# Altium PCB FLIR LWIR.PcbDoc (part 4 of 5)
Units mil, origin at the board's own origin, x right, y up, seen from the top; angles counter-clockwise.
Board outline 1511 x 3115 mil, 2 copper layers (Top Layer, Bottom Layer); 105 components, 128 nets, 625 pads, 229 vias.
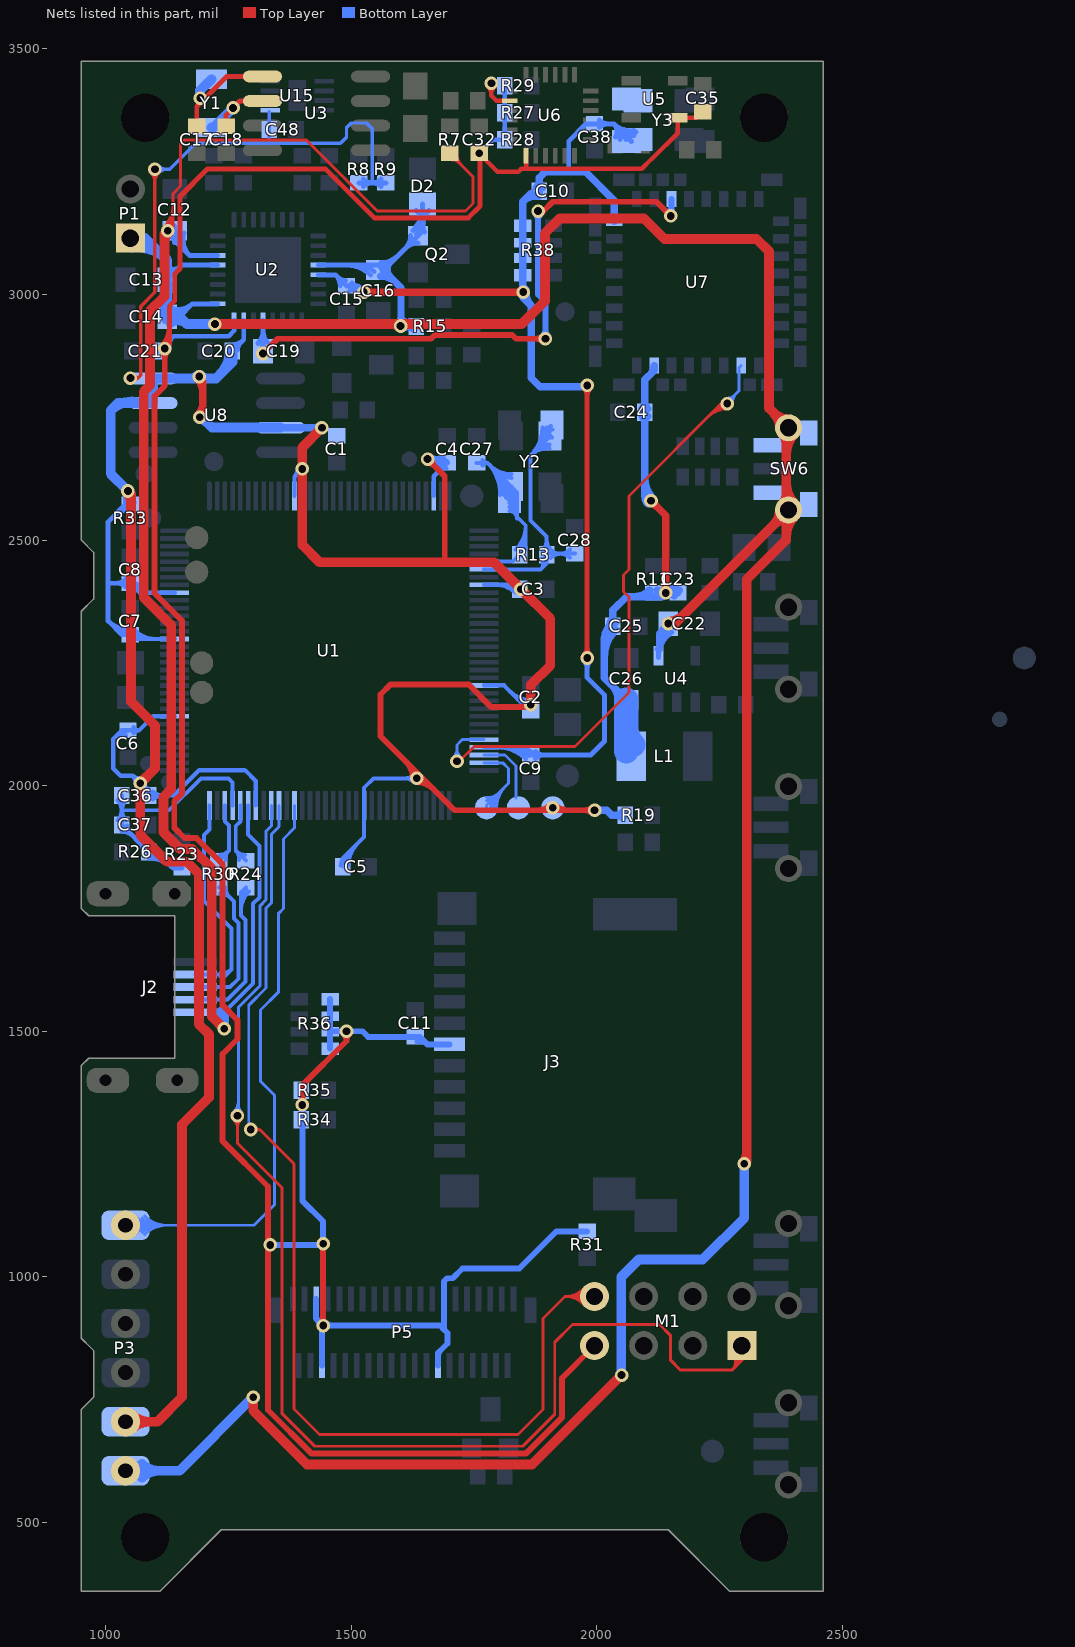
[diagram p4: the nets of this part, all layers, seen from the top]

## Via types
v1: diameter 27.56, hole 15.75, Top Layer to Bottom Layer, tented both sides, 229 vias

## Nets (pads, with @x,y where several pads share a name; then routed paths per layer and width w, separated by ;. In a path a pad name is that pad's centre, name@x,y a point inside that pad or via, vN(x,y) a via of type N, cw(c..) or ccw(c..) an arc to the next point about the centre after c; other vN are vias at no path point) (continued)
UART0_RX: M1.1 U1.88 | length 2840.5
  Top Layer w6: v1@1260.38,1320.38 cw(c1241.98,1301.98) 1268,1301.98 cw(c1294.02,1301.98) v1@1275.62,1320.38 ; v1(1268,1328) 1268,1272 1359,1181 1359,721.15 1425.15,655 1848.94,655 1914,720.06 1914,867.03 1949.97,903 2127,903 2150,880 2150,830 2170,810 2275,810 ; M1.1@2275.58,841.93 cw(c2258.74,826.27) 2275,810 ; 2279.4,814.4 ccw(c2263.29,830.5) M1.1@2279.97,846.02 ; 2283.8,818.8 ccw(c2267.85,834.74) M1.1@2284.36,850.11 ; 2288.2,823.2 ccw(c2272.41,838.98) M1.1@2288.76,854.19 ; M1.1@2291.75,833.67 cw(c2291.3,830) 2295,830 ; 2292.6,827.6 ccw(c2276.97,843.22) M1.1@2293.15,858.28 ; M1.1@2295,860 2295,830 ; M1.1@2298.25,833.67 ccw(c2298.7,830) 2295,830 ; 2275,810 2295,830
  Bottom Layer w6: v1@1260.38,1335.62 ccw(c1237.15,1358.85) 1270,1358.85 ; v1@1264.62,1331.38 ccw(c1251.63,1344.37) 1270,1344.37 ; v1@1270,1330 1270,1548.94 1314.19,1593.13 1314.19,1755.64 1325.72,1767.17 1325.72,1906.63 1336.89,1917.8 U1.88@1336.89,1960.04 ; 1270,1349.2 ccw(c1289.2,1349.2) v1@1275.62,1335.62
UART0_TX: M1.8 U1.87 | length 2392.2
  Top Layer w6: v1(1295,1300) 1313.18,1300 ; v1@1304.46,1294.83 cw(c1313.18,1290.07) 1313.18,1300 ; v1@1304.46,1305.17 ccw(c1313.18,1309.93) 1313.18,1300 ; M1.8@1975.38,942.15 ccw(c1935,905.42) 1935,960 ; M1.8@1975.38,977.85 cw(c1935,1014.58) 1935,960 ; M1.8@1979.82,946.19 ccw(c1948.57,917.76) 1948.57,960 ccw(c1948.57,1002.24) M1.8@1979.82,973.81 ; M1.8@1984.25,950.22 ccw(c1962.14,930.11) 1962.14,960 ccw(c1962.14,989.89) M1.8@1984.25,969.78 ; M1.8@1995,960 1935,960 ; 1313.18,1300 1383,1230.18 1383,731.09 1435.09,679 1839,679 1890,730 1890,915 1935,960
  Bottom Layer w6: v1@1291,1300 1291,1552.97 1326.19,1588.16 1326.19,1750.67 1337.72,1762.2 1337.72,1901.66 1352.64,1916.58 U1.87@1352.64,1960.04
UART2_RX: pad.1@1775,1955 U1.63 | length 313
  Bottom Layer w6: U1.63@1769.96,2046.65 1808.35,2046.65 1820,2035 1820,2005 1775,1960 pad.1@1775,1955 ; pad.1@1775,1969.62 ccw(c1775,1992.85) 1791.43,1976.43 ; pad.1@1775,1975.62 ccw(c1775,2013.34) 1801.67,1986.67 ; pad.1@1783.62,1955 cw(c1816.51,1955) 1793.25,1978.25 ; pad.1@1789.62,1955 cw(c1836.99,1955) 1803.5,1988.5 ; pad.1@1795.62,1955 cw(c1857.48,1955) 1813.74,1998.74
UART2_TX: pad.1@1840,1955 U1.62 | length 139.3
  Bottom Layer w6: U1.62@1769.96,2062.4 1812.6,2062.4 1835,2040 pad.1@1835,1975
UART4_TX: P3.6 pad.3@1040,1105 U1.85 | length 1652
  Bottom Layer w6: pad.3@1040,1105 1301.82,1105 1343,1146.18 1343,1370 1315,1398 1315,1543.03 1351.22,1579.25 1351.22,1739.41 1361.72,1749.9 1361.72,1891.72 1384.13,1914.13 U1.85@1384.13,1960.04 ; pad.3@1050.61,1094.39 cw(c1076.21,1068.79) 1076.21,1105 cw(c1076.21,1141.21) pad.3@1050.61,1115.61 ; pad.3@1054.85,1090.15 cw(c1090.7,1054.3) 1090.7,1105 cw(c1090.7,1155.7) pad.3@1054.85,1119.85 ; pad.3@1059.09,1085.91 cw(c1105.18,1039.82) 1105.18,1105 cw(c1105.18,1170.18) pad.3@1059.09,1124.09 ; P3.6@1069.82,1094.39 cw(c1095.43,1068.79) 1095.43,1105 cw(c1095.43,1141.21) P3.6@1069.82,1115.61 ; P3.6@1074.06,1090.15 cw(c1109.91,1054.3) 1109.91,1105 cw(c1109.91,1155.7) P3.6@1074.06,1119.85 ; P3.6@1078.3,1085.91 cw(c1124.4,1039.82) 1124.4,1105 cw(c1124.4,1170.18) P3.6@1078.3,1124.09
USB5V: C12.2 J2.1 R7.2 U1.91 U2.22 | length 3895.5
  Top Layer w6: v1@1118.38,3137.62 ccw(c1073.42,3182.58) 1137,3182.58 ; v1@1122.62,3133.38 ccw(c1087.9,3168.1) 1137,3168.1 ; v1(1126,3130) 1137,3141 ; v1@1126.86,3129.14 ccw(c1102.39,3153.61) 1137,3153.61 ; v1@1130.46,3139.81 ccw(c1132.87,3145.13) 1137,3141 ; v1@1131.11,3124.89 ccw(c1116.88,3139.12) 1137,3139.12 ; v1@1135.81,3134.46 cw(c1141.13,3136.87) 1137,3141 ; R7.2@1700,3287.44 1747.78,3239.66 1747.78,3185.56 1732.22,3170 1552.57,3170 1407.57,3315 1160,3315 1152.22,3307.22 1152.22,3220.76 1137,3205.54 1137,3141 ; R7.2@1701.97,3274.69 cw(c1701.97,3248.67) 1720.37,3267.07 ; R7.2@1708.72,3287.44 ccw(c1729.76,3287.44) R7.2@1714.88,3272.56 ; R7.2@1714.72,3287.44 ccw(c1750.25,3287.44) 1725.12,3262.32
  Top Layer w20: 1119.22,3104.51 cw(c1151.49,3104.51) v1@1128.67,3127.33 ; v1(1126,3130) 1119.22,3123.22 1119.22,2995.93 1090.22,2966.93 1090.22,2815.22 1077.22,2802.22 1077.22,2382.78 1133,2327 1133,1993 1117.22,1977.22 1117.22,1905.21 1150.89,1871.54 1151.43,1871.54 ; 1151.43,1871 1175.77,1871 1215.78,1830.99 1215.78,1530.22 v1(1241,1505)
  Bottom Layer w8: 1234.17,1542.69 ccw(c1234.17,1569.74) 1253.29,1550.61 ; 1241.49,1538.82 1300,1597.33 1300,1759.83 1312.72,1772.55 1312.72,1877.28 1289.65,1900.35 U1.91@1289.65,1960.04
  Bottom Layer w10: C12.2@1125.39,3121.24 cw(c1124.31,3105.59) 1140,3105.59 ; C12.2@1126.08,3131.22 cw(c1125.05,3116.3) C12.2@1140,3116.3 ; C12.2@1126.45,3131.13 cw(c1116.15,3105.34) C12.2@1141.85,3115.88 ; C12.2@1126.78,3141.19 cw(c1125.79,3127.02) C12.2@1140,3127.02 ; C12.2@1131.42,3120.17 ccw(c1122.75,3135.9) C12.2@1140.48,3133.09 ; C12.2@1140,3140 C12.2@1140,3130 1140,3110 1170.47,3079.53 ; C12.2@1140.24,3131.52 ccw(c1167.35,3122.89) 1147.23,3102.77 ; C12.2@1149.76,3128.48 ccw(c1184.98,3117.28) 1158.85,3091.15 ; C12.2@1159.29,3125.45 ccw(c1202.62,3111.67) 1170.47,3079.53 ; U2.22@1227.59,3079.53 1170.47,3079.53
  Bottom Layer w20: 1232.04,1538.82 ccw(c1246.18,1538.82) 1236.18,1528.82 ; v1@1237.37,1506.07 ccw(c1209.33,1514.32) 1230,1535 1241,1524 v1(1241,1505) ; 1235.67,1540.32 cw(c1222.8,1527.45) 1241,1527.45 ccw(c1222.8,1527.45) 1235.67,1540.32
USB_D_N: R24.2 U1.92 | length 164.6
  Bottom Layer w8: 1266.34,1866.22 ccw(c1283.03,1882.92) R24.2@1283.03,1859.31 ; R24.2@1271.35,1848.77 ccw(c1247.67,1851.23) 1264.5,1868.06 ; U1.92@1273.9,1960.04 1273.9,1927.39 1264.5,1918 1264.5,1868.06 ; R24.2@1285,1847.56 1264.5,1868.06
USB_D_P: R30.2 U1.94 | length 164
  Bottom Layer w8: R30.2@1230,1847.56 1250.5,1868.06 ; R30.2@1231.97,1859.31 ccw(c1231.97,1882.92) 1248.66,1866.22 ; U1.94@1242.4,1960.04 1242.4,1927.39 1250.5,1919.29 1250.5,1868.06 ; R30.2@1243.65,1848.77 cw(c1267.33,1851.23) 1250.5,1868.06
USB_ID: J2.4 U1.96 | length 490.6
  Bottom Layer w8: J2.4@1182,1615.59 1245.59,1615.59 1256,1626 ; U1.96@1210.91,1960.04 1210.91,1910.91 1200,1900 1200,1765 1256,1709 1256,1626 ; 1233.43,1611.53 ccw(c1235.81,1624.61) 1245.21,1615.21 ; 1234.86,1619.4 ccw(c1239.14,1642.86) 1256,1626 ; 1236.9,1612.85 cw(c1243.52,1606.24) 1243.52,1615.59 cw(c1243.52,1624.94) 1236.9,1618.33
USB_VSS: C36.1 C37.1 R23.1 R26.2 U1.93 | length 949.7
  Bottom Layer w8: 1035,1950 1128.74,1950 1193.74,2015 1250,2015 1258.15,2006.85 U1.93@1258.15,1960.04
  Bottom Layer w10: C37.1@1024.84,1929.57 ccw(c1006.49,1947.92) 1032.44,1947.92 ccw(c1058.39,1947.92) C37.1@1040.04,1929.57 ; C36.1@1024.84,1970.43 cw(c1006.49,1952.08) 1032.44,1952.08 cw(c1058.39,1952.08) C36.1@1040.04,1970.43 ; C37.1@1032.44,1907.28 cw(c1032.44,1876.3) 1054.35,1898.21 ; C36.1@1032.44,1980 1032.44,1920.12 R26.2@1087.56,1865 1105,1865 ; C37.1@1043.19,1918.03 ccw(c1064.1,1918.03) 1049.31,1903.25 ; 1065.85,1886.71 ccw(c1087.56,1908.42) R26.2@1087.56,1877.72 ; 1070.6,1881.96 cw(c1055.62,1866.97) R26.2@1076.81,1866.97 ; R26.2@1087.32,1872.28 cw(c1087.93,1848.68) 1104.63,1865.37 ; R26.2@1087.58,1862.28 cw(c1088.76,1816.58) 1121.09,1848.91 ; R26.2@1087.84,1852.29 cw(c1089.59,1784.48) R23.1@1137.56,1832.44 ; R26.2@1097.16,1860.17 cw(c1105,1856.22) 1105,1865 ; R26.2@1097.16,1869.83 ccw(c1105,1873.78) 1105,1865 ; 1108.27,1861.73 ccw(c1153.03,1906.49) R23.1@1153.03,1843.19 ; 1115.18,1846.45 ccw(c1136.37,1880.28) R23.1@1149.5,1842.59 ; 1125.34,1844.66 ccw(c1153.03,1872.35) R23.1@1153.03,1833.19 ; 1132.85,1835.39 ccw(c1145.16,1855.05) R23.1@1152.79,1833.15 ; R23.1@1155,1832.44 R23.1@1137.56,1832.44 ; 1105,1865 R23.1@1137.56,1832.44
USBHS_N: J2.2 R24.1 | length 405.1
  Bottom Layer w8: J2.2@1182,1564.41 1247.28,1564.41 1284,1601.12 1284,1726.3 1274.75,1735.55 1274.75,1782.19 R24.1@1285,1792.44 ; 1236.9,1561.67 cw(c1243.52,1555.06) 1243.52,1564.41 cw(c1243.52,1573.76) 1236.9,1567.15 ; 1274.75,1744.09 cw(c1331.39,1744.09) R24.1@1291.34,1784.13 ; 1274.75,1763.4 cw(c1312.07,1763.4) R24.1@1285.68,1789.79
USBHS_P: J2.3 R30.1 | length 357.8
  Bottom Layer w8: J2.3@1182,1590 1253.08,1590 1270,1606.92 1270,1720.5 1260.75,1729.75 1260.75,1764.25 1232.56,1792.44 R30.1@1230,1792.44 ; R30.1@1231.97,1780.69 cw(c1231.97,1750.91) 1253.03,1771.97 ; 1236.9,1587.26 cw(c1243.52,1580.65) 1243.52,1590 cw(c1243.52,1599.35) 1236.9,1592.74 ; R30.1@1243.72,1792.44 ccw(c1270.65,1792.44) 1251.61,1773.39
VCC_BAT: C13.2 C14.2 C16.2 C22.2 D2.1 P1.1 P3.1 pad.3@1040,605 Q2.2 R15.1 SW6.1 U2.4 U2.17 U2.21 U4.4 | length 8606.3
  Top Layer w20: v1(1222,2940) 1846.87,2940 1894,2987.13 1894,3124.91 1924.08,3155 2095.92,3155 2137.69,3113.22 2325,3113.22 2350,3088.22 2350,2768.66 SW6.1@2390,2728.66 2385.22,2723.88 SW6.1@2385.22,2556.56 ; v1(1300,755) 1300,727.82 1409.82,618 1868,618 v1(2050,800) ; 1581.22,2940 cw(c1581.22,2917.22) v1@1597.33,2933.33 ; v1@1602.67,2933.33 cw(c1618.78,2917.22) 1618.78,2940 ; v1(2145,2330) 2158.66,2330 SW6.1@2385.22,2556.56 ; v1@2145,2333.78 ccw(c2145,2375.89) 2174.77,2346.11 ; v1@2297.33,1232.67 ccw(c2279.34,1250.66) 2304.78,1250.66 ; v1(2300,1230) 2304.78,1234.78 2304.78,2419.78 2385.22,2500.22 SW6.1@2385.22,2556.56 ; SW6.1@2372.44,2561.34 cw(c2330.05,2561.34) 2360.02,2531.36 cw(c2390,2501.39) SW6.1@2390,2543.78 ; SW6.1@2372.44,2728.66 ccw(c2330.05,2728.66) 2360.02,2758.64 ccw(c2390,2788.61) SW6.1@2390,2746.22 ; SW6.1@2377.58,2548.92 cw(c2359.15,2530.49) 2385.22,2530.49 ; SW6.1@2377.58,2573.75 ccw(c2359.15,2592.19) 2385.22,2592.19 ; SW6.1@2377.58,2716.25 cw(c2359.15,2697.81) 2385.22,2697.81 ; 2385.22,2507.41 cw(c2443.93,2507.41) SW6.1@2402.42,2548.92 ; 2385.22,2615.27 ccw(c2443.93,2615.27) SW6.1@2402.42,2573.75 ; 2385.22,2674.73 cw(c2443.93,2674.73) SW6.1@2402.42,2716.25
  Bottom Layer w10: C14.2@1118.5,2946.48 ccw(c1129.02,2968.36) 1146.19,2951.19 ; C14.2@1122.83,2955.49 ccw(c1135.5,2981.82) 1156.16,2961.16 ; C13.2@1125,3030 1154.84,3059.84 ; C13.2@1126.63,3049.91 ccw(c1130.38,3084.31) 1154.84,3059.84 ; C14.2@1127.17,2964.51 ccw(c1141.98,2995.29) 1166.13,2971.13 ; C14.2@1131.5,2973.52 ccw(c1148.46,3008.75) 1176.1,2981.1 ; C13.2@1140,3035 cw(c1164.14,3035) 1147.07,3052.07 ; 1150,2955 1176.1,2981.1 ; U2.17@1227.59,2981.1 1176.1,2981.1 ; U2.21@1227.59,3059.84 1154.84,3059.84 ; U2.4@1432.41,3059.84 1555.16,3059.84 1565,3050 1565.75,3050 Q2.2@1635.63,3119.88 1645,3129.25 D2.1@1645,3184.57 ; 1490.02,3059.84 cw(c1490.02,2990.02) C16.2@1539.39,3039.39 ; 1514.17,3059.84 cw(c1514.17,3014.17) C16.2@1546.46,3046.46 ; C16.2@1560,3055 ccw(c1560,3080.95) C16.2@1578.35,3062.6 ; C16.2@1560,3065 ccw(c1560,3115.09) 1595.42,3079.67 ; C16.2@1575,3050 cw(c1597.34,3050) 1581.54,3065.79 ; v1@1599.15,2936.88 cw(c1623.15,2912.05) R15.1@1623.74,2946.58 ; 1614.67,2940.33 ccw(c1625.23,2950.9) R15.1@1632.1,2937.63 ; Q2.2@1620.63,3119.88 cw(c1584.42,3119.88) 1610.02,3094.28 cw(c1635.63,3068.67) Q2.2@1635.63,3104.88 ; Q2.2@1625.02,3130.49 ccw(c1576.8,3178.72) D2.1@1645,3178.72 ; R15.1@1627.5,2946.51 cw(c1618.63,2963.63) 1605,2950 1620,2935 R15.1@1632.44,2935 ; Q2.2@1628.13,3132.87 ccw(c1603.29,3175.9) D2.1@1651.28,3163.04 ; D2.1@1631.83,3171.4 cw(c1600.04,3139.61) 1645,3139.61 cw(c1689.96,3139.61) D2.1@1658.17,3171.4 ; Q2.2@1632.09,3123.42 ccw(c1600.94,3154.57) 1645,3154.57 ; Q2.2@1633.13,3124.21 ccw(c1620.36,3146.33) Q2.2@1645.03,3139.72 ; 1646.35,3144.64 ccw(c1668.32,3138.75) Q2.2@1648.62,3127.38 ; U4.4@2121.77,2277.75 ccw(c2113.51,2286.02) 2125.2,2286.02 ccw(c2136.89,2286.02) U4.4@2128.62,2277.75 ; U4.4@2122.78,2278.52 ccw(c2111.19,2298.6) 2133.57,2292.6 ; U4.4@2125.2,2261.33 cw(c2185.83,2261.33) C22.2@2153.1,2312.37 ; U4.4@2125.2,2264.49 2125.2,2310.2 v1(2145,2330) ; U4.4@2125.2,2279.63 cw(c2174.1,2279.63) C22.2@2147.7,2320.79 ; 2125.2,2297.92 cw(c2162.37,2297.92) C22.2@2142.3,2329.21 ; 2127.76,2289.17 ccw(c2143.57,2284.94) U4.4@2129.39,2276.75 ; C22.2@2129.25,2314.88 cw(c2143.67,2301.75) C22.2@2144.59,2321.23 ; 2131.17,2302.64 ccw(c2112.39,2319.75) C22.2@2136.62,2327.37 ; C22.2@2132.02,2317.93 ccw(c2120.05,2328.83) C22.2@2136.23,2329.59 ; C22.2@2136.22,2330 cw(c2115.02,2330) 2130.01,2315.01 cw(c2145,2300.02) C22.2@2145,2321.22 ; C22.2@2142.89,2315.51 ccw(c2131.6,2325.79) C22.2@2146.16,2330.37
  Bottom Layer w15: C16.2@1560,3037.5 cw(c1560,2995.25) 1589.87,3025.13 ; C16.2@1565,3050 1601,3014 1601,2935 R15.1@1620,2935 ; C16.2@1572.5,3050 ccw(c1590.61,3050) C16.2@1577.8,3037.2 ; v1@1595.56,2940.44 ccw(c1582.43,2953.57) 1601,2953.57 ; v1@1603.52,2930.8 cw(c1613.89,2915.5) R15.1@1618.67,2933.35 ; v1@1604.44,2940.44 ccw(c1617.57,2953.57) R15.1@1617.57,2935 ; v1@1605.17,2939.56 ccw(c1612.99,2944.95) 1615.44,2935.78 ; R15.1@1626.61,2929.17 ccw(c1612.53,2915.09) 1612.53,2935 ccw(c1612.53,2954.91) R15.1@1626.61,2940.83
  Bottom Layer w20: pad.3@1040,605 1150,605 v1(1300,755) ; P1.1@1049.95,3115.47 cw(c1056.07,3059.98) 1095.54,3099.46 ; P1.1@1050,3115 1080,3115 ; P1.1@1052.14,3095.59 cw(c1061.93,3006.93) 1125,3070 ; pad.3@1054.14,590.86 cw(c1088.28,556.72) 1088.28,605 cw(c1088.28,653.28) pad.3@1054.14,619.14 ; P1.1@1067.86,3107.1 cw(c1080,3101.72) 1080,3115 ; P1.1@1067.86,3122.9 ccw(c1080,3128.28) 1080,3115 ; P3.1@1073.35,590.86 cw(c1107.5,556.72) 1107.5,605 cw(c1107.5,653.28) P3.1@1073.35,619.14 ; C14.2@1117.93,2967.07 ccw(c1100.86,2984.14) 1125,2984.14 ccw(c1149.14,2984.14) C14.2@1132.07,2967.07 ; C13.2@1117.93,3017.93 cw(c1100.86,3000.86) 1125,3000.86 cw(c1149.14,3000.86) C13.2@1132.07,3017.93 ; C13.2@1117.93,3042.07 ccw(c1100.86,3059.14) 1125,3059.14 ccw(c1149.14,3059.14) C13.2@1132.07,3042.07 ; C14.2@1118.86,2957.89 cw(c1132.86,2939.9) 1148.98,2956.02 ; C14.2@1131.14,2942.11 cw(c1146.88,2921.88) 1165,2940 ; C14.2@1132.07,2947.93 cw(c1149.14,2930.86) 1149.14,2955 cw(c1149.14,2979.14) C14.2@1132.07,2962.07 ; v1@1220,2940 1165,2940 ; v1(2050,800) 2049.47,800.53 2049.47,999.47 2085,1035 2215,1035 2300,1120 v1(2300,1230) ; 1080,3115 1125,3070 ; 1125,3070 C13.2@1125,3030 C14.2@1125,2955 1150,2955 1165,2940
  other v1: 1600,2936
VCC_C_1V2: C23.1 C24.2 C25.2 C26.2 L1.2 R11.2 U7.7 | length 1636.9
  Top Layer w15: v1@2110,2573.72 cw(c2110,2558.56) 2120.72,2569.28 cw(c2131.44,2580) v1@2116.28,2580 ; v1(2110,2580) 2140,2550 v1(2140,2392.44) ; v1@2135.56,2396.88 ccw(c2124.84,2407.6) 2140,2407.6 ccw(c2155.16,2407.6) v1@2144.44,2396.88
  Bottom Layer w15: 2015,2261.01 cw(c2094.46,2261.01) C25.2@2038.27,2317.2 ; 2015,2294.14 cw(c2035.84,2294.14) C25.2@2033.4,2314.84 ; 2015,2297.23 cw(c2058.25,2297.23) C25.2@2027.67,2327.81 ; C25.2@2024.19,2322.86 cw(c1992.79,2322.21) 2015,2300 ; C25.2@2026.61,2332.8 ccw(c2012.53,2346.88) 2032.44,2346.88 ccw(c2052.35,2346.88) C25.2@2038.27,2332.8 ; 2030.13,2204.87 cw(c2000.25,2175) C26.2@2042.5,2175 ; C26.2@2042.2,2192.8 ccw(c2055,2205.61) C26.2@2055,2187.5 ; C26.2@2060,2175 2015,2220 2015,2300 ; 2075.16,2385 ccw(c2075.16,2430.32) R11.2@2107.2,2398.27 ; C24.2@2091.73,2752.2 cw(c2077.65,2738.12) 2097.56,2738.12 cw(c2117.47,2738.12) C24.2@2103.39,2752.2 ; C24.2@2091.73,2767.8 ccw(c2077.65,2781.88) 2097.56,2781.88 ccw(c2117.47,2781.88) C24.2@2103.39,2767.8 ; 2097.56,2588.98 ccw(c2118.98,2588.98) v1@2103.83,2573.83 ; 2097.56,2625.2 ccw(c2155.2,2625.2) v1@2114.44,2584.44 ; R11.2@2106.88,2385 ccw(c2106.88,2425.57) v1@2135.56,2396.88 ; v1(2110,2580) 2097.56,2592.44 C24.2@2097.56,2760 2097.56,2826.42 2116.42,2845.28 U7.7@2116.42,2855.32 ; U7.7@2110.05,2838.91 ccw(c2100.35,2848.62) U7.7@2114.07,2848.62 ; v1@2144.15,2396.59 cw(c2156.32,2384.42) C23.1@2167.37,2397.62 ; v1@2144.44,2388 cw(c2155.16,2377.28) 2155.16,2392.44 cw(c2155.16,2407.6) v1@2144.44,2396.88 ; C23.1@2157.2,2386.61 ccw(c2143.12,2372.53) 2143.12,2392.44 ccw(c2143.12,2412.35) C23.1@2157.2,2398.27 ; C23.1@2157.74,2386.12 ccw(c2145.76,2371.8) R11.2@2132.56,2385 ; C23.1@2165,2392.44 v1(2140,2392.44) R11.2@2132.56,2385 ; 2015,2300 2032.44,2317.44 C25.2@2032.44,2325 2032.44,2357.44 2060,2385 R11.2@2132.56,2385 ; v1@2136.88,2392.44 ccw(c2136.88,2372.53) 2122.8,2386.61 cw(c2136.88,2372.53) v1@2136.88,2392.44 ; v1@2136.88,2392.44 cw(c2136.88,2412.35) 2122.8,2398.27 ccw(c2136.88,2412.35) v1@2136.88,2392.44
  Bottom Layer w50: L1.2@2060,2070 C26.2@2060,2175 ; 2060,2116.21 ccw(c2106.21,2116.21) L1.2@2073.54,2083.54
VCC_CA_2V8: C19.2 U2.13 U7.19 | length 1451.2
  Top Layer w12: v1(1320,2880) 1350,2910 1662,2910 1670,2918 1827,2918 1835,2910 v1(1895,2910) ; v1(1880,3170) 1891,3170 1910,3189 2121,3189 v1(2150,3160) ; v1@1889.5,2904.5 ccw(c1876.22,2891.22) 1876.22,2910 ccw(c1876.22,2928.78) v1@1889.5,2915.5
  Bottom Layer w10: C19.2@1309.39,2900.61 ccw(c1283.41,2926.59) 1320.16,2926.59 ; C19.2@1313.79,2886.21 ccw(c1298.42,2901.58) C19.2@1320.16,2901.58 ; C19.2@1320.16,2885.16 U2.13@1320.16,2947.59 ; C19.2@1320.16,2900.82 ccw(c1340.82,2900.82) C19.2@1326.21,2886.21 ; 1320.16,2925.83 ccw(c1355.83,2925.83) C19.2@1330.61,2900.61
  Bottom Layer w12: v1@1874.5,3164.5 cw(c1861.22,3151.22) 1880,3151.22 cw(c1898.78,3151.22) v1@1885.5,3164.5 ; v1@1880,3165 1880,3000 1895,2985 v1(1895,2910) ; v1@1889.5,2915.5 ccw(c1876.22,2928.78) 1895,2928.78 ccw(c1913.78,2928.78) v1@1900.5,2915.5 ; v1@2144.5,3165.5 ccw(c2126.75,3183.25) U7.19@2151.85,3183.25 ; v1(2150,3160) 2151.85,3161.85 U7.19@2151.85,3194.68 ; 2151.85,3174.31 ccw(c2164.31,3174.31) v1@2155.5,3165.5
VCC_CIO_2V8: C9.2 C10.2 C15.2 C38.1 R38.5 R38.6 R38.7 R38.8 U1.61 U2.5 U7.16 Y3.4 | length 3316
  Top Layer w10: v1@1973.79,2266.21 ccw(c1958.8,2281.2) 1980,2281.2 ccw(c2001.2,2281.2) v1@1986.21,2266.21 ; v1@1973.79,2808.79 cw(c1958.8,2793.8) 1980,2793.8 cw(c2001.2,2793.8) v1@1986.21,2808.79 ; v1(1980,2260) v1(1980,2815)
  Top Layer w15: v1(1525,3005) v1(1850,3005) ; v1@1529.44,3000.56 cw(c1540.16,2989.84) 1540.16,3005 cw(c1540.16,3020.16) v1@1529.44,3009.44 ; v1@1845.56,3000.56 ccw(c1834.84,2989.84) 1834.84,3005 ccw(c1834.84,3020.16) v1@1845.56,3009.44
  Bottom Layer w9: U1.61@1769.96,2078.15 1849.41,2078.15 C9.2@1865,2062.56 ; U1.61@1798.24,2078.15 cw(c1798.24,1997.77) C9.2@1855.08,2054.61 ; 1819.97,2078.15 cw(c1819.97,2019.49) C9.2@1861.44,2060.97 ; 1841.69,2078.15 cw(c1841.69,2041.22) C9.2@1867.81,2067.33
  Bottom Layer w10: U2.5@1432.41,3040.16 1467.4,3040.16 C15.2@1490,3017.56 ; 1468.29,3039.27 cw(c1446.58,3017.56) C15.2@1477.28,3017.56 ; 1473.04,3034.52 ccw(c1488.03,3049.5) C15.2@1488.03,3028.31 ; C15.2@1492.35,3016.92 cw(c1502.32,3000.39) v1@1515.96,3014.04 ; C15.2@1497.52,3008.35 cw(c1509.12,2989.12) v1(1525,3005) 1512.44,3017.56 ; C15.2@1500.82,3011.46 cw(c1512.44,3003.44) 1512.44,3017.56 ; C15.2@1500.82,3023.66 ccw(c1512.44,3031.68) 1512.44,3017.56 ; C15.2@1505.66,3019.99 cw(c1494.87,3001.3) v1@1516.29,3003.93 ; C15.2@1506.4,3017.56 cw(c1506.4,2995.42) v1@1526.08,3005.56 ; 1511.35,3017.85 cw(c1505.43,2995.78) v1@1526.1,3005.52 ; v1@1517.2,3000.98 ccw(c1490,2986.97) C15.2@1490,3017.56 ; C9.2@1865,2062.56 1987.56,2062.56 2015,2090 2015,2185 1980,2220 v1(1980,2260) ; C9.2@1874.57,2054.96 cw(c1892.92,2036.61) 1892.92,2062.56 cw(c1892.92,2088.51) C9.2@1874.57,2070.16 ; 1942.5,3250 1942.5,3312.5 1977.56,3347.56 C38.1@1995,3347.56 2034.33,3347.56 ; v1@1973.79,2253.79 cw(c1958.8,2238.8) 1980,2238.8 cw(c2001.2,2238.8) v1@1986.21,2253.79 ; C38.1@2004.57,3339.96 cw(c2022.92,3321.61) 2022.92,3347.56 cw(c2022.92,3373.51) C38.1@2004.57,3355.16 ; Y3.4@2038.04,3320.79 ccw(c2018.49,3331.72) 2034.33,3347.56 ; 2043.68,3338.21 cw(c2030.48,3325.02) Y3.4@2046.77,3315.9 ; Y3.4@2048.62,3333.27 ccw(c2071.6,3356.26) Y3.4@2075.94,3324.04 ; 2049.75,3337.15 cw(c2045.66,3305.27) Y3.4@2071.45,3324.45 ; Y3.4@2052.87,3329.02 cw(c2039.36,3315.5) Y3.4@2058.47,3315.5 ; Y3.4@2070.2,3311.69 2034.33,3347.56 ; Y3.4@2073.09,3334.15 cw(c2071.89,3324.78) Y3.4@2079.47,3330.42 ; Y3.4@2074.61,3333.96 cw(c2068.21,3381.43) 2034.33,3347.56 ; C15.2@1490,3017.56 1512.44,3017.56
  Bottom Layer w15: 1848.5,3023.77 ccw(c1868.77,3023.77) v1@1854.44,3009.44 ; v1(1850,3005) 1850,2993.33 1866.5,2976.83 ; v1@1855,3010 1848.5,3016.5 R38.5@1848.5,3039.61 R38.6@1848.5,3074.25 R38.7@1848.5,3105.75 R38.8@1848.5,3140.39 1848.5,3189.01 ; v1@1856.26,3004.52 ccw(c1891.47,3001.8) 1866.5,2976.84 ; C10.2@1875.01,3211.61 cw(c1864.49,3216.67) 1864.49,3205 ; C10.2@1876.61,3217.8 ccw(c1862.53,3231.88) 1882.44,3231.88 ccw(c1902.35,3231.88) C10.2@1888.27,3217.8 ; C10.2@1881.25,3199.87 ccw(c1875.69,3161.83) 1848.51,3189.01 ; v1@1969.56,2812.44 1884.06,2812.44 1866.5,2830 1866.5,2976.83 ; U7.16@2035.32,3149.02 2035.32,3191.31 1976.62,3250 1942.5,3250 1895,3250 1882.44,3237.44 1882.44,3205 1864.49,3205 ; 1848.5,3189.01 1864.49,3205
VCC_LCD_3V3: C11.2 C21.2 C32.2 C35.2 J3.4 M1.7 P5.5 P5.6 P5.26 P5.27 R27.2 R28.1 R29.1 R31.1 R34.2 R35.2 R36.5 R36.6 R36.7 R36.8 U2.16 U5.4 U6.8 U6.13 | length 7543.1
  Top Layer w8: 1855.79,3256.03 1855.79,3259.21
  Top Layer w9: C32.2@1761.78,3285.66 1797.44,3250 1840,3250 1846.03,3256.03 1855.79,3256.03 2091.03,3256.03 2111.78,3276.78 2112.66,3276.78 2164.49,3328.62 U5.4@2164.49,3360.2 2202.76,3360.2 C35.2@2215,3372.44 ; v1@1778.44,3423.44 cw(c1762.6,3407.6) 1785,3407.6 cw(c1807.4,3407.6) v1@1791.56,3423.44 ; v1@1785,3435 1785,3405 1795.47,3394.53 U6.8@1822.28,3394.53 ; 1855.79,3259.21 U6.13@1855.79,3282.28
  Top Layer w10: v1@1113.79,2896.21 ccw(c1076.54,2933.46) 1129.22,2933.46 ; v1@1120.86,2889.14 ccw(c1100.69,2909.31) 1129.22,2909.31 ; v1@1129.22,2899.22 1129.22,2976.23 1140.22,2987.23 1140.22,3042.26 1151,3053.04 1151,3199.74 1207.04,3255.78 1447,3255.78 1546.77,3156 1738.01,3156 1761.78,3179.77 C32.2@1761.78,3285.66
  Top Layer w12: v1@1114.5,2884.5 cw(c1101.22,2871.22) 1120,2871.22 cw(c1138.78,2871.22) v1@1125.5,2884.5 ; v1(1120,2890) 1120,2813.88 1099.22,2793.1 1099.22,2391.89 1155,2336.11 1155,1983.89 1139.22,1968.11 1139.22,1914.32 1160,1893.54 1184.34,1893.54 1237.78,1840.1 1237.78,1552.75 1268,1522.53 1268,1484.08 1237.78,1453.86 1237.78,1276.22 1330,1184 1330,728.93 1418.93,640 1855.15,640 1929,713.85 1929,794 M1.7@1995,860 ; v1(1400,1350) 1400,1390 1490,1480 v1(1490,1500) ; v1(1442.49,900.78) v1(1442.49,1067.49) ; v1@1484.5,1494.5 cw(c1471.22,1481.22) 1490,1481.22 cw(c1508.78,1481.22) v1@1495.5,1494.5
  Bottom Layer w9: C21.2@1107.56,2885 1137.56,2915 ; v1@1129.22,2891.06 cw(c1158.16,2894.4) 1137.56,2915 ; U2.16@1261.1,2947.59 1261.1,2926.1 1250,2915 1137.56,2915 ; v1(1760,3287.44) 1787.56,3315 R28.1@1812.44,3315 R27.2@1812.44,3370 R29.1@1812.44,3425
  Bottom Layer w12: v1(1335,1065) v1@1440,1065 ; v1(1400,1350) 1400,1195 1400,1155 1442.49,1112.51 v1(1442.49,1067.49) ; P5.5@1428.27,955 1428.27,915 v1(1442.49,900.78) 1680.68,900.78 1688.11,893.35 ; v1@1434.71,900.78 ccw(c1415.93,900.78) 1429.21,914.06 ccw(c1442.49,927.34) v1@1442.49,908.56 ; P5.6@1440.08,819.17 v1@1440.08,900.78 ; v1@1447.99,906.28 ccw(c1461.27,919.56) 1461.27,900.78 ; R36.8@1456.5,1464.61 R36.7@1456.5,1499.25 ; R36.5@1456.5,1565.39 R36.6@1456.5,1530.75 R36.7@1456.5,1499.25 ; C11.2@1634.21,1479.21 cw(c1639.32,1457.63) 1655,1473.31 ; P5.26@1676.2,838.86 cw(c1690.42,838.86) 1680.37,848.91 ; P5.26@1676.3,819.17 1676.3,844.84 1695.78,864.32 1695.78,885.68 1688.11,893.35 ; J3.4@1700,1473.31 1655,1473.31 ; R31.1@1980,1092.56 1917.56,1092.56 1841.78,1016.78 1726.04,1016.78 1706.48,997.22 1695,997.22 1688.11,990.33 P5.27@1688.11,955 1688.11,893.35 ; R36.7@1456.5,1499.25 1457.24,1500 v1(1490,1500) 1522.44,1500 1533.75,1488.69 C11.2@1630,1488.69 1639.62,1488.69 1655,1473.31
  other v1: 1785,3430
VCC_M_3V3: C1.2 C2.2 C3.2 C4.2 C5.2 C6.2 C7.2 C8.2 C20.2 C36.2 C48.2 P3.2 pad.1@1910,1955 pad.3@1040,705 R8.2 R9.1 R19.2 R33.2 U1.12 U1.30 U1.40 U1.53 U1.76 U1.90 U1.104 U1.114 U1.120 U2.15 U8.3 U8.7 U8.8 U15.5 | length 10197
  Top Layer w7: v1(1050,2830) 1065,2830 ; v1@1059.59,2826.29 cw(c1065,2824.2) 1065,2830 ; v1@1059.59,2833.71 ccw(c1065,2835.8) 1065,2830 ; v1@1092.73,3247.73 cw(c1075.86,3230.86) 1099.72,3230.86 ; 1099.72,3229.51 cw(c1125.49,3229.51) v1@1107.27,3247.73 ; v1(1100,3255) 1099.72,3254.72 1099.72,3004.72 1070.72,2975.72 1070.72,2835.72 1065,2830
  Top Layer w12: 1611.23,2048.77 cw(c1577.47,2015) v1@1625.22,2015 ; v1@1633,2007.22 cw(c1633,1959.47) 1666.77,1993.23 ; v1@1655,2657.22 cw(c1655,2638.44) 1668.28,2651.72 cw(c1681.56,2665) v1@1662.78,2665 ; v1(1655,2665) 1690,2630 1690,2455 ; v1@1865,2172.78 1852.22,2160 1785,2160 1739.22,2205.78 1579.32,2205.78 1559.22,2185.68 1559.22,2100.78 1710,1950 v1(1995,1950) ; 1879.15,1950 ccw(c1879.15,1985.85) v1@1904.5,1960.5 ; v1@1915.5,1960.5 ccw(c1940.85,1985.85) 1940.85,1950 ; v1@1989.5,1944.5 ccw(c1976.22,1931.22) 1976.22,1950 ccw(c1976.22,1968.78) v1@1989.5,1955.5
  Top Layer w15: v1@1185.56,2828.56 cw(c1157.27,2800.27) 1197.28,2800.27 ; v1@1186.56,2754.44 ccw(c1160.68,2780.32) 1197.28,2780.32 ; v1@1197.28,2752.28 v1@1197.28,2822.72
  Top Layer w20: pad.3@1040,705 1105,705 1155,755 1155,1310 1210,1365 1210,1493.89 1189.78,1514.11 1189.78,1820.22 1165,1845 1125,1845 1070,1900 v1(1070,2005) 1100,2035 1100,2122.89 1051.22,2171.66 1051.22,2593.78 v1(1045,2600) ; v1@1042.33,2597.33 cw(c1020.86,2575.86) 1051.22,2575.86 ; pad.3@1054.14,690.86 cw(c1088.28,656.72) 1088.28,705 cw(c1088.28,753.28) pad.3@1054.14,719.14 ; v1(1440,2729) 1400,2689 v1(1400,2645) 1400,2490 1435,2455 1690,2455 1790,2455 v1(1845,2400) 1905,2340 1905,2245 1865,2205 v1@1865,2172.78
  Bottom Layer w7: v1(1100,3255) 1130,3255 1182.81,3307.81 1477.81,3307.81 1490,3320 1490,3340 1499.28,3349.28 1530.72,3349.28 1542.5,3337.5 1542.5,3227.44 ; v1@1107.27,3247.73 cw(c1124.82,3230.18) 1124.82,3255 cw(c1124.82,3279.82) v1@1107.27,3262.27 ; 1332.44,3309.94 C48.2@1332.44,3336 U15.5@1332.44,3372.76
  Bottom Layer w8: C5.2@1478.19,1836.97 cw(c1505.28,1836.97) 1486.12,1856.12 ; C5.2@1482.44,1835 1482.44,1852.44 1525.87,1895.87 U1.76@1525.87,1960.04 1525.87,1995.87 1545,2015 v1(1633,2015) ; C5.2@1486.19,1836.97 cw(c1532.59,1836.97) 1499.78,1869.78 ; C5.2@1494.19,1836.97 cw(c1559.9,1836.97) 1513.44,1883.44 ; v1@1626.08,2008.08 ccw(c1609.39,1991.39) 1609.39,2015 ccw(c1609.39,2038.61) v1@1626.08,2021.92
  Bottom Layer w9: 1004.5,2410 1006.94,2412.44 C8.2@1050,2412.44 1069.33,2393.11 ; 1026,2106 cw(c1038.02,2093.98) C6.2@1042.45,2110.39 ; C6.2@1040.1,2101.7 ccw(c1033.34,2076.66) 1015,2095 ; C8.2@1040.08,2404.49 ccw(c1020.88,2385.29) 1020.88,2412.44 ccw(c1020.88,2439.6) C8.2@1040.08,2420.39 ; C7.2@1050,2307.44 1058.82,2298.62 U1.114@1140.04,2298.62 ; C8.2@1051.97,2401.19 cw(c1051.97,2378.79) 1067.81,2394.63 ; C7.2@1053.56,2309.03 ccw(c1078.69,2334.16) 1078.69,2298.62 ; C6.2@1056.43,2106.48 cw(c1067.56,2099.34) 1067.56,2112.56 ; C6.2@1056.43,2118.64 ccw(c1067.56,2125.78) 1067.56,2112.56 ; C7.2@1059.92,2315.39 ccw(c1100.41,2355.89) 1100.41,2298.62 ; v1@1060.73,2005.37 ccw(c1041.14,2006.14) 1055,2020 ; C8.2@1063.13,2411.08 ccw(c1084.67,2408.45) 1069.33,2393.11 ; v1@1069.63,2014.27 cw(c1068.86,2033.86) 1055,2020 ; v1@1070,1995.72 cw(c1070,1973.32) 1085.84,1989.16 cw(c1101.68,2005) v1@1079.28,2005 ; C36.2@1072.4,1996.04 cw(c1075.71,1983.69) C36.2@1082.1,1994.76 ; C36.2@1076.5,1984.03 ccw(c1053.35,1988.34) v1(1070,2005) ; C36.2@1077.7,1997.3 ccw(c1087.56,2007.16) C36.2@1087.56,1993.22 ; v1@1079.26,2004.35 ccw(c1091.49,2003.5) C36.2@1085.36,1992.88 ; C36.2@1095.51,1972.05 cw(c1114.71,1952.84) 1114.71,1980 cw(c1114.71,2007.15) C36.2@1095.51,1987.95 ; U1.104@1140.04,2141.14 1096.14,2141.14 1067.56,2112.56 ; U1.120@1140.04,2393.11 1069.33,2393.11 ; U1.90@1305.39,1960.04 1305.39,2009.61 1283.24,2031.76 1190,2031.76 1138.24,1980 C36.2@1087.56,1980 1087.56,1987.44 v1(1070,2005) ; U1.12@1384.13,2589.96 1384.13,2629.13 ; v1@1390.72,2645 cw(c1368.32,2645) 1384.16,2629.16 ; v1@1395,2640 1384.13,2629.13 ; v1@1400,2635.72 ccw(c1400,2613.32) 1384.16,2629.16 ; U1.30@1667.6,2589.96 1667.6,2630.04 C4.2@1695,2657.44 ; 1672.44,2634.88 ccw(c1649.88,2657.44) C4.2@1681.78,2657.44 ; 1677.19,2639.63 cw(c1693.03,2623.79) C4.2@1693.03,2646.19 ; U1.53@1769.96,2204.13 1810.87,2204.13 C2.2@1857.5,2157.5 ; U1.40@1769.96,2408.86 C3.2@1833.58,2408.86 ; U1.40@1798.65,2408.86 cw(c1798.65,2358.18) C3.2@1834.49,2394.02 ; 1801.21,2408.86 cw(c1801.21,2356.21) C3.2@1838.44,2393.44 ; 1816.99,2404.12 ccw(c1826.06,2419.83) C3.2@1838.59,2406.71 ; 1820.38,2408.86 cw(c1820.38,2379.91) C3.2@1840.85,2400.38 ; 1822.94,2408.86 cw(c1822.94,2377.94) C3.2@1844.8,2399.8 ; 1823.55,2191.45 ccw(c1865,2232.9) v1@1865,2174.28 ; C3.2@1827.39,2398.11 ccw(c1834.7,2410.78) C3.2@1844.81,2400.2 ; C3.2@1836,2397.75 ccw(c1821.04,2394.01) 1828.75,2407.37 ccw(c1834.01,2416.49) C3.2@1839.86,2407.72 ; 1838.92,2176.08 ccw(c1865,2202.17) C2.2@1865,2165.28 ; 1015,2095 1032.56,2112.56 C6.2@1045,2112.56 1067.56,2112.56 ; 1015,2095 1015,2035 1030,2020 1055,2020 ; 1055,2020 v1(1070,2005)
  Bottom Layer w10: 1015.97,2548.53 cw(c1048.03,2516.47) R33.2@1048.03,2561.81 ; 1021.01,2318.99 ccw(c1047.12,2345.11) C7.2@1048.01,2308.19 ; R33.2@1033.04,2565.6 cw(c1048.03,2550.61) R33.2@1048.03,2571.81 ; R33.2@1045,2577.56 1004.5,2537.06 1004.5,2410 1004.5,2335.5 ; C7.2@1047.77,2318.19 cw(c1046.34,2377.33) 1004.5,2335.5 ; C7.2@1050,2307.44 1032.56,2307.44 1004.5,2335.5 ; C20.2@1257.56,2885 1280.79,2908.23 U2.15@1280.79,2947.59 ; C20.2@1257.56,2897.72 ccw(c1257.56,2928.42) 1279.27,2906.71 ; C20.2@1268.31,2886.97 cw(c1289.5,2886.97) 1274.52,2901.96 ; R8.2@1515,3227.44 1542.5,3227.44 ; R8.2@1524.66,3219.93 cw(c1542.5,3202.49) 1542.5,3227.44 ; R8.2@1524.66,3234.95 ccw(c1542.5,3252.39) 1542.5,3227.44 ; R9.1@1560.34,3219.93 ccw(c1542.5,3202.49) 1542.5,3227.44 ; R9.1@1560.34,3234.95 cw(c1542.5,3252.39) 1542.5,3227.44 ; R9.1@1570,3227.44 1542.5,3227.44
  Bottom Layer w12: v1@1658.89,2658.26 cw(c1668.28,2642) 1673.14,2660.14 cw(c1678,2678.28) v1@1661.74,2668.89 ; v1@1660.5,2659.5 cw(c1673.78,2646.22) 1673.78,2665 cw(c1673.78,2683.78) v1@1660.5,2670.5 ; C4.2@1685.68,2651.04 ccw(c1655,2624.31) v1(1655,2665) 1687.44,2665 C4.2@1695,2657.44
  Bottom Layer w15: U8.3@1355.67,2729 v1(1440,2729) ; v1@1435.56,2724.56 ccw(c1424.84,2713.84) 1424.84,2729 ccw(c1424.84,2744.16) v1@1435.56,2733.44 ; v1(1995,1950) 2020,1950 2030,1940 R19.2@2057.44,1940 ; v1@1999.44,1945.56 cw(c2010.16,1934.84) 2010.16,1950 cw(c2010.16,1965.16) v1@1999.44,1954.44 ; R19.2@2051.61,1934.17 ccw(c2037.53,1920.09) 2037.53,1940 ccw(c2037.53,1959.91) R19.2@2051.61,1945.83
  Bottom Layer w20: R33.2@1045,2577.56 v1(1045,2600) 1010,2635 1010,2764 ; v1@1045,2593.75 ccw(c1069.23,2593.75) R33.2@1052.1,2576.62 ; U8.7@1077.36,2777.16 ccw(c1053.45,2720.55) 1010,2764 ; 1171.22,2829 ccw(c1171.22,2851.78) v1@1187.33,2835.67 ; v1@1191,2746.22 cw(c1191,2727.44) 1204.28,2740.72 ; v1@1192.67,2835.67 ccw(c1208.78,2851.78) 1208.78,2829 ; v1@1195,2750 1216,2729 U8.3@1355.67,2729 ; 1233.27,2838.27 ccw(c1188.51,2883.03) C20.2@1251.81,2883.03 ; C20.2@1257.56,2885 1257.56,2862.56 1224,2829 U8.8@1096.3,2829 U8.7@1096.3,2779 1025,2779 1010,2764
  other v1: 1910,1955 1865,2165 1191,2750 1190,2833
VSYNC: U1.60 U7.2 | length 1466.1
  Top Layer w6: v1(1715,2050) 1720,2050 1750,2080 1955,2080 2065,2190 2065,2383.94 2054,2394.94 2054,2429.15 2065,2440.15 2065,2590 2253,2778 v1(2265,2778) ; 2226.11,2751.11 cw(c2265,2712.23) v1@2265,2767.22 ; 2236.36,2761.36 cw(c2265,2732.71) v1@2265,2773.22 ; 2246.6,2771.6 cw(c2265,2753.2) v1@2265,2779.22
  Bottom Layer w6: v1@1707.38,2057.62 ccw(c1688.98,2076.02) 1715,2076.02 ccw(c1741.02,2076.02) v1@1722.62,2057.62 ; v1(1715,2050) 1715,2083.03 1725.87,2093.9 U1.60@1769.96,2093.9 ; v1@2264,2779 2289.5,2804.5 2289.5,2851.24 U7.2@2293.58,2855.32 ; v1@2265,2788.78 ccw(c2265,2809.98) 2279.99,2794.99 ; v1@2269.78,2778 cw(c2286.15,2778) 2274.57,2789.57 ; v1@2275.78,2778 cw(c2306.63,2778) 2284.82,2799.82
X32_IN: C17.1 U3.1 Y1.2 | length 247.7
  Top Layer w10: C17.1@1185,3342.56 1185,3383 1192,3390 1246,3444 U3.1@1319,3444
  Bottom Layer w20: v1(1192,3400) 1192,3415.43 Y1.2@1215,3438.43
X32_OUT: C18.1 U3.2 Y1.1 | length 170.9
  Top Layer w10: C18.1@1245,3341.25 C18.1@1245,3342.56 1245,3366.08 v1(1258.92,3380) 1272.92,3394 U3.2@1319,3394
  Bottom Layer w20: Y1.1@1215,3340 1218.92,3340 v1(1258.92,3380)
X_EN: Y3.1
XT_IN: C27.1 R13.1 U1.37 Y2.1 | length 975.7
  Bottom Layer w8: C27.1@1755,2657.44 1777.06,2657.44 ; C27.1@1767.21,2651.68 cw(c1777.06,2646.14) 1777.06,2657.44 ; C27.1@1767.21,2663.2 ccw(c1777.06,2668.74) 1777.06,2657.44 ; U1.37@1769.96,2456.1 1828.54,2456.1 R13.1@1842.44,2470 1855,2482.56 1855,2530 ; 1781.92,2652.58 ccw(c1825.5,2696.16) Y2.1@1825.5,2634.53 ; 1789.75,2644.75 cw(c1740.43,2595.42) Y2.1@1810.09,2591.72 ; 1795.58,2638.92 ccw(c1825.5,2668.84) Y2.1@1825.5,2626.53 ; 1796.18,2638.32 cw(c1772.76,2614.91) Y2.1@1805.88,2614.91 ; Y2.1@1802.1,2592.14 ccw(c1716.33,2596.7) 1777.06,2657.44 ; Y2.1@1802.45,2632.05 cw(c1764.54,2594.14) Y2.1@1818.08,2591.29 ; Y2.1@1815.14,2586.43 cw(c1790.17,2546.29) 1837.44,2546.29 ; Y2.1@1815.14,2619.36 cw(c1788.64,2592.86) Y2.1@1826.06,2590.87 ; Y2.1@1819.36,2593.23 cw(c1799.12,2560.69) Y2.1@1837.44,2560.69 ; Y2.1@1821.66,2559.67 cw(c1821.64,2543.87) 1837.44,2543.87 ; Y2.1@1821.68,2567.67 cw(c1821.65,2551.88) 1837.44,2551.88 ; Y2.1@1821.69,2575.67 cw(c1821.66,2559.89) Y2.1@1837.44,2559.89 ; Y2.1@1823.59,2600.02 cw(c1808.08,2575.09) Y2.1@1837.44,2575.09 ; R13.1@1834.2,2480.34 ccw(c1785.33,2530) 1855,2530 ; R13.1@1839.81,2474.64 ccw(c1804.13,2510.9) 1855,2510.9 ; R13.1@1845.42,2468.94 ccw(c1822.92,2491.8) 1855,2491.8 ; 1777.06,2657.44 Y2.1@1825.5,2609 1837.44,2597.06 1837.44,2547.56 1855,2530
XT_OUT: C28.2 R13.2 U1.38 Y2.3 | length 985.6
  Bottom Layer w8: U1.38@1769.96,2440.35 1885.35,2440.35 ; 1865.55,2673.05 ccw(c1809.71,2728.9) Y2.3@1888.69,2728.9 ; 1875.18,2682.68 ccw(c1851.76,2706.09) Y2.3@1884.88,2706.09 ; 1877.29,2684.79 cw(c1901,2661.08) Y2.3@1903.6,2694.51 ; 1879.21,2686.71 ccw(c1837.02,2728.9) Y2.3@1896.69,2728.9 ; Y2.3@1881.4,2693.1 cw(c1928.68,2680.43) Y2.3@1909.71,2725.56 ; Y2.3@1885.62,2708.87 cw(c1920.67,2699.48) Y2.3@1906.61,2732.93 ; R13.2@1887.67,2461.7 cw(c1873.25,2452.46) 1885.36,2440.35 ; R13.2@1889.25,2480.28 ccw(c1869.2,2500.33) 1897.56,2500.33 ccw(c1925.92,2500.33) 1905.87,2480.28 ccw(c1924.78,2499.19) 1924.78,2472.44 ; 1892.39,2447.39 ccw(c1881.82,2457.95) R13.2@1894.4,2466.01 ; Y2.3@1892.87,2700.37 ccw(c1864.34,2728.9) Y2.3@1904.69,2728.9 ; Y2.3@1897.16,2704.66 cw(c1908.31,2693.51) Y2.3@1908.31,2709.28 ; Y2.3@1902.98,2686.53 ccw(c1899.22,2638.28) 1865,2672.5 ; Y2.3@1905.06,2712.56 Y2.3@1904.5,2712 1865,2672.5 ; R13.2@1905.87,2463.66 cw(c1927.06,2442.47) 1927.06,2472.44 ; C28.2@1944.72,2464.13 ccw(c1924.67,2444.08) 1924.67,2472.44 ccw(c1924.67,2500.8) C28.2@1944.72,2480.75 ; C28.2@1955,2472.44 1900,2472.44 R13.2@1897.56,2470 ; 1865,2672.5 1865,2540 1897.56,2507.44 R13.2@1897.56,2470 ; 1885.35,2440.35 1897.56,2452.56 R13.2@1897.56,2470
pads on no net: M1.4 M1.5 M1.6 P5.3 P5.8 P5.9 P5.10 P5.11 P5.12 P5.14 P5.15 P5.16 U1.4 U1.5 U1.6 U1.7 U1.8 U1.10 U1.23 U1.24 U1.27 U1.31 U1.32 U1.33 U1.34 U1.35 U1.84 U1.115 U1.116 U1.117 U2.1 U2.3 U2.6 U2.7 U2.8 U2.9 U2.10 U2.12 U2.14 U2.27 U6.2 U6.3 U6.4 U6.5 U6.6 U6.7 U6.14 U6.15 U6.16 U6.17 U6.19 U6.21 U6.22 U7.17 U7.28 U7.29 U7.31 U7.32 U15.3 U15.6

## Polygon pours and split planes (outlines as drawn)
GND on Bottom Layer "Top Layer-No Net" (solid, pour order 45): 1323.11,750 1295,750 1270,725 1245,700 1245,655 1245,650 1320,575 1430,575 1320,575 1325,570 1335,570 1755,570 1760,575 1765,580 1770,580 1770,590 1790,610 1800,620 1800,640 1809.49,640 1836.22,666.73 1845,675.51 1845,755.17 1834.83,755.17 1830,760 1800.63,730.63 1783.12,730.63 1783.12,746.88 1770,760 1765,765 1735,765 1695,765 1680,780 1675,780 1630,780 1500,780 1475,780 1460,765 1360,765 1350,765 1335,780
GND on Bottom Layer "Top Layer-No Net" (solid, pour order 44): 2003.72,1106.28 2003.72,1043.72 1990,1030 1982.56,1037.44 1940,1037.44 1892.44,1037.44 1854.78,999.78 1845,990 1845,935 1845,925 1835,915 1830,910 1830,905 1830,886.97 1818.03,875 1818.03,860 1825,860 1835,850 1835,840 1835,785 1825,775 1818.03,775 1818.03,725 1828.03,735 1845,735 1845,659.97 1827.58,642.55 1812.56,627.53 1812.56,613.26 1812.56,592.44 1820,585 1840,565 1870,565 2230,565 2240,555 2245,550 2365,550 2365,560 2330,595 2325,590 2320,590 2295,615 2290,620 2240,620 2215,645 2238,668 2238,680 2238,795 2223,810 2165,810 2060,810 2050,800 2055,805 2055,930 2055,1000 2075,1020 2115,1060 2115,1160
GND on Bottom Layer "Top Layer-No Net" (solid, pour order 42): 1456.76,1053.24 1445,1065 1440,1065 1395,1065 1335,1065 1325,1055 1290,1055 1235,1000 1090,855 1060,855 1010,855 985,830 985,765 1005,745 1090,745 1290,745 1300,755 1305,750 1415,750 1415,765 1405,775 1385,775 1375,785 1375,815 1375,845 1390,860 1392.83,862.83 1392.83,882.17 1381.02,893.98 1380,895 1380,915 1370,925 1370,940 1370,983.98 1381.02,995 1386.02,990 1410,990 1430,990 1450,1010 1465,1025 1480,1025 1505.48,1025 1520.26,1039.78 1505.04,1055 1500,1055
GND on Bottom Layer "Top Layer-No Net" (solid, pour order 37): 1945,2500 2010,2500 2031.62,2500 2071.62,2540 2085,2553.38 2085,2605 2085,2720 2075,2730 2075,2760 2075,2790 2070,2795 2059.8,2805.2 1997.24,2805.2 1975.2,2805.2 1945,2775 1970,2800 1975,2800 1975,2810 1980,2815 1977.44,2812.44 1884.06,2812.44 1866.5,2830 1866.35,2830.15 1850,2830.15 1757.16,2737.31 1652.31,2737.31 1625,2710 1605,2690 1625,2690 1655,2690 1770,2690 1780,2680 1790,2670 1850,2670 1865,2685 1875,2695 1895,2695 1895,2685 1890,2680 1880,2670 1880,2635 1880,2540 1920,2500
GND on Bottom Layer "Top Layer-No Net" (solid, pour order 35): 1557.36,1895 1557.36,1862.64 1570,1850 1620,1800 1670,1800 1765,1800 1790,1775 1795,1770 1795,1710 1795,1630 1810,1615 1815,1610 1855,1610 1865,1610 1880,1595 1882,1593 1882,1345 1882,1317 1865,1300 1860,1295 1820,1295 1815,1295 1790,1270 1790,1240 1790,1150 1770,1130 1769.22,1130.78 1610,1130.78 1585.15,1130.78 1569.22,1114.85 1569.22,1025 1569.22,1014.22 1560,1005 1555,1000 1535,1000 1535,1025.04 1520.26,1039.78 1475,1039.78 1470.22,1039.78 1450,1060 1442.49,1067.51 1442.49,1086.27 1442.49,1112.51 1410,1145 1400,1155 1400,1285 1400,1250 1425,1275 1725,1275 1730,1275 1740,1285 1740,1340 1740,1710 1730,1720 1725,1715 1660,1715 1640,1715 1580,1775 1580,1790 1570,1800 1560,1810 1540,1810 1530,1810 1520,1820 1520,1855 1520,1873.39 1541.61,1895
GND on Bottom Layer "Top Layer-No Net" (solid, pour order 34): 2100,1990 2255,1990 2270,2005 2310,1965 2340,1965 2330,1965 2315,1950 2310,1945 2310,1935 2310,1895 2325,1880 2325,1710 2325,1255 2300,1230 2300,1165 2300,1120 2225,1045 2215,1035 2085,1035 2075,1035 2020,1090 1995,1115 1995,1175 1995,1775 2070,1850 2100,1880 2100,1885 2115,1885 2125,1895 2130,1900 2130,1940 2130,1965 2115,1980
GND on Bottom Layer "Top Layer-No Net" (solid, pour order 33): 2335,2430 2360,2430 2410,2430 2425,2415 2425,2390 2425,2380 2435,2370 2450,2355 2450,2350 2450,570 2430,550 2370,550 2360,550 2345,565 2320,590 2320,600 2320,625 2325,630 2330,625 2365,625 2395,625 2405,635 2405,660 2405,680 2395,690 2390,695 2360,695 2315,695 2305,705 2305,720 2305,800 2335,830 2335,870 2335,910 2325,920 2300,945 2300,985 2310,995 2350,995 2395,995 2400,1000 2400,1020 2400,1050 2390,1060 2355,1060 2315,1060 2305,1070 2305,1090 2305,1860 2325,1880 2360,1880 2390,1880 2400,1890 2405,1895 2405,1910 2405,1935 2395,1945 2390,1950 2325,1950 2325,1954.33 2328.76,1958.09 2323.63,1963.23 2251.77,1963.23 2268.23,1963.23 2275,1970 2255,1990 2255,1995 2255,2120 2290,2155 2290,2190 2290,2225 2315,2250 2350,2250 2395,2250 2400,2255 2400,2280 2400,2300 2390,2310 2325,2310 2250,2310 2245,2305 2210,2340 2210,2345 2210,2385 2220,2395 2230,2405 2240,2405 2245,2405 2265,2385 2310,2385 2330,2405 2331.14,2406.14 2340.67,2406.14
VCC_BAT on Bottom Layer "Top Layer-No Net" (solid, pour order 31): 2325,2750 2390,2750 2430,2750 2440,2750 2450,2740 2450,2715 2450,2615 2450,2545 2445,2540 2435,2530 2390,2530 2355,2530 2325,2560 2315,2570 2315,2590 2315,2605 2320,2610 2385,2610 2395,2610 2415,2630 2415,2645 2415,2660 2410,2665 2395,2680 2380,2680 2335,2680 2320,2695 2320,2735 2335,2750
GND on Bottom Layer "Top Layer-No Net" (solid, pour order 30): 2235,3460 2250,3445 2260,3435 2260,3430 2260,3300 2245,3315 2245,3325 2245,3340 2240,3345 2225,3360 2225,3365
GND on Bottom Layer "Top Layer-No Net" (solid, pour order 28): 2250,3385 2245,3380 2245,3350 2245,3345 2305,3285 2415,3285 2445,3255 2445,3145 2420,3145 2390,3175 2395,3180 2395,3215 2395,3245 2387.5,3252.5 2380,3260 2305,3260 2265,3260 2245,3280 2245,3315 2245,3340.24 2240.12,3345.12 2230.24,3355 2230,3355
GND on Bottom Layer "Top Layer-No Net" (solid, pour order 25): 1975,3325 2015,3325 2020,3325 2025,3320 2025,3290 2030,3285 2035,3280 2040,3280 2110,3280 2120,3290 2120,3300 2120,3445 2135,3460 2175,3460 2235,3460 2250,3445 2250,3420 2250,3355 2245,3350 2240,3345 2215,3345 2155,3345 2150,3340 2150,3315 2150,3295 2155,3290 2164.8,3280.2 2209.8,3280.2 2230,3260 2380,3260 2395,3245 2395,3225 2395,3215 2395,3225 2395,3215 2405,3215 2425,3215 2430,3210 2445,3195 2445,3180 2445,2815 2420,2790 2400,2770 2355,2770 2310,2770 2305,2775 2300,2780 2300,2805 2300,2825 2305,2830 2310,2835 2310,2845 2310,2880 2305,2885 2310,2880 2310,2875 2300,2885 2285,2885 2180,2885 2170,2875 2170,2860 2170,2835 2175,2830 2170,2835 2170,2845 2170,2840 2180,2830 2185,2825 2185,2805 2185,2795 2175,2785 2125,2785 2120,2785 2105,2800 2097.56,2807.44 2097.56,2815 2097.56,2797.56 2090,2790 2095,2785 2095,2770 2052.44,2770 2042.44,2760 1987.44,2815 1980,2815 1917.56,2815 1915,2812.44 1884.06,2812.44 1866.5,2830 1866.5,2880 1880,2880 1900,2900 1975,2975 1990,2975 2005,2975 2025,2955 2060,2955 2060,2935 2065,2930 2060,2935 2060,2955 2050,2955 2075,2930 2060,2945 2060,2930 2060,2920 2085,2895 2100,2895 2100,2898 2105,2903 2123,2903 2140,2920 2135,2925 2135,3020 2076.85,3078.15 2073.7,3075 2025,3075 2020,3080 1985,3080 1975,3090 1975,3155 1975,3135 1920,3190 1920,3220 1920,3227.5 1942.5,3250 1942.5,3290 1942.5,3307.5 1960,3325
GND on Bottom Layer "Top Layer-No Net" (solid, pour order 24): 1645,2810 1633.28,2798.28 1628.28,2798.28 1593.28,2798.28 1590,2795 1580,2785 1520,2785 1515,2785 1500,2800 1500,2825 1495,2825 1480,2840 1430,2840 1370,2840 1345,2865 1345,2895 1345,2920.47 1359.53,2935 1374.53,2920 1405,2920 1430,2920 1445,2935 1455,2945 1455,2970 1475,2990 1480,2995 1570,2995 1585,2995 1595,2985 1601,2979 1601,2945 1601,2941 1590,2930 1590,2900 1585,2900 1550,2865 1575,2840 1580,2840 1590,2840 1595,2845 1600,2850 1600,2880 1615,2895 1640,2895 1650,2885 1650,2815
GND on Bottom Layer "Top Layer-No Net" (solid, pour order 41): 1165,1630 1241,1630 1256,1645 1256,1709 1225,1740 1200,1765 1200,1790 1185,1805 1180,1810 1150,1810 1080,1810 1060,1830 1040,1850 1040,1860 1025,1860 1015,1850 965,1800 965,1775 985,1755 990,1760 1140,1760 1140,1755 1150,1745 1150,1695 1150,1640 1160,1630
GND on Bottom Layer "Top Layer-No Net" (solid, pour order 43): 1120,1425 1005,1425 980,1425 960,1405 960,1330 960,1180 985,1155 990,1150 1085,1150 1115,1120 1120,1115 1210,1115 1290,1115 1320,1145 1325,1150 1325,1210 1325,1215 1265,1275 1245,1295 1245,1375 1245,1380 1200,1425
GND on Top Layer "Top Layer-No Net" (solid, pour order 46): 1755,570 2090,570 2225,570 2245,550 2425,550 2430,550 2450,570 2461,581 2461,615 2461,2354 2435,2380 2420,2395 2360,2395 2340,2395 2310,2365 2305,2360 2305,2280 2305,1225 2270,1190 2250,1170 2250,1085 2250,1070 2295,1025 2256.47,986.47 2256.47,950 2256.47,933.53 2285,905 2320,870 2320,850 2315,850 2275,810 2190,810 2080,810 2050,780 1955,685 1930,685 1930,675 1880,625
GND on Top Layer "Top Layer-No Net" (solid, pour order 32): 1386,2055 1385,2054 1385,2015 1385,2010 1345,1970 1340,1965 1340,1870 1340,1795 1380,1755 1385,1760 1580,1760 1645,1695 1645,1540 1645,1535 1580,1470 1580,1340 1555,1340 1535,1360 1525,1370 1525,1400 1510,1415 1465,1415 1435,1415 1415,1395 1405,1385 1405,1310 1510,1205 1725,990 2000,990 2160,990 2220,1050 2225,1055 2225,1305 2225,1865 2155,1935 2150,1940 2000,1940 1995,1940 1985,1950 1715,1950 1710,1950 1575,2085 1555,2105 1555,2225 1445,2225 1435,2215
GND on Top Layer "Top Layer-No Net" (solid, pour order 39): 1510,2910 1930,2910 1955,2885 1965,2875 1965,2820 1975,2820 1980,2815 1980,2260 1985,2260 2005,2240 1995.15,2230.15 1995.15,2205 1995.15,2235.15 2005,2245 2005,2214.85 1945.15,2155 1930.15,2140 1895,2140 1890,2140 1865,2165 1870,2170 1870,2215 1875,2215 1905,2245 1905,2340 1905,2345 1825,2425 1795,2455 1715,2455 1715,2460 1690,2485 1690,2630 1690,2635 1650,2675 1630,2695 1630,2735 1630,2760 1680,2810 1678.63,2808.63 1587.28,2808.63 1476.37,2808.63 1475,2810
GND on Top Layer "Top Layer-No Net" (solid, pour order 26): 1797.44,3250 1840,3250 1844.88,3250 1850.91,3256.03 1870,3256.03 2091.9,3256.03 2150,3314.13 2164.49,3328.62 2164.49,3345 2164.49,3360.2 2164.68,3360 2215,3360 2230,3360 2260,3330 2305,3285 2350,3285 2415,3285 2445,3255 2445,3205 2445,2795 2425,2775 2401.56,2775 2370,2806.56 2370,2955 2370,3110 2347.78,3132.22 2145.56,3132.22 2107.78,3170 2103.79,3174 1916.21,3174 1875,3132.78 1875,3045 1840,3010 1835,3005 1780,3005 1745,3005 1710,3040 1710,3090 1710,3097 1743,3130 1742.01,3130.99 1742.01,3160 1761.78,3179.77 1761.78,3232.71 1762.71,3232.71 1775,3245 1815,3245 1810,3250
GND on Top Layer "Top Layer-No Net" (solid, pour order 27): 1495,2910 1350,2910 1320,2880 1239,2799 1239,2760 1239,2661 1240,2660 1130.72,2550.72 1130.72,2470 1130.72,2404.94 1146.66,2389 1150.66,2385 1190,2385 1190,2350 1195,2345 1175,2325 1175,2316.11 1175,2150 1205,2120 1210,2125 1271,2125 1290.22,2125 1315,2100.22 1318.52,2103.74 1364.26,2103.74 1364.26,2084.26 1355,2075 1355.78,2074.22 1355.78,2041.62 1355.78,2010.78 1355,2010 1373.45,1991.55 1392.22,1991.55 1392.22,1997.22 1425,2030 1542.87,2147.87 1548.54,2147.87 1548.54,2175 1579.32,2205.78 1630,2205.78 1630.78,2205 1710,2205 1715,2205 1755,2165 1865,2165 1865,2172.78 1865,2238.11 1865,2255 1875,2265 1874.78,2265.22 1874.78,2370.22 1790,2455 1660,2455 1455,2455 1405,2505 1455,2455 1555,2455 1555,2485 1555,2550 1611.64,2606.64 1611.64,2715 1611.64,2773.36 1595,2790 1600,2795 1600,2840 1560,2840 1535,2815 1517.5,2832.5 1517.5,2842.5 1545,2870 1550,2875 1550,2910
GND on Top Layer "Top Layer-No Net" (solid, pour order 29): 1815,2160 1860,2160 1865,2165 1865,2205 1865,2215 1890,2240 1905,2255 1905,2275 1905,2345 1900,2350 1869.45,2380.55 1841.38,2380.55 1790.55,2380.55 1750,2340 1715,2305 1715,2285 1715,2265 1720,2260
GND on Top Layer "Top Layer-No Net" (solid, pour order 36): 970,1445 950,1425 950,1410 950,1180 965,1165 980,1150 1030,1150 1080,1150 1110,1120 1130,1120 1130,1310 1195,1375 1195,1410 1195,1490 1170,1515 1160,1505 1160,1465 1160,1455 1140,1435 1055,1435 970,1435 950,1415
GND on Top Layer "Top Layer-No Net" (solid, pour order 38): 1150,1730 1150,1740 1140,1750 1080,1750 965,1750 955,1760 950,1765 950,1780 950,3250 965,3265 1050,3265 1075.46,3265 1092.73,3247.73 1100,3240.46 1100,3205 1100,3020 1095,3015 1095,2885 1095,2820 1077.22,2802.22 1070,2795 1070,2635 1065,2635 1040,2610 1050,2600 1050,2560 1050,2172.89 1051.22,2171.66 1100,2122.89 1100,2095 1100,2035 1070,2005 1070,1900 1125,1845 1137.39,1832.61 1177.39,1832.61 1195,1815 1189.78,1809.78 1189.78,1685
GND on Top Layer "Top Layer-No Net" (solid, pour order 40): 1237.78,1276.22 1237.78,1360 1232.78,1365 1210,1365 1160,1315 1150,1305 1150,1265 1150,780 1155,775 1165,765 1165,750 1170,745 1170,700 1170,680 1235,615 1285,565 1480,565 1808,565 1830,587 1817,600 1480,600 1383.98,600 1280,703.98 1245,738.98 1245,755 1280,755 1290,765 1330,805 1330,820 1330,1185 1310,1205 1238.78,1276.22 1237.78,1276.22

## Keep-outs
Keep-Out Layer:
  lines w10: 2460,3475 950,3475 950,2500 975,2475 975,2380 950,2355 950,1750 965,1735 1140,1735 1140,1445 965,1445 950,1430 950,875 975,850 975,755 950,730 950,360 1110,360 1235,485 2145,485 2270,360 2461,360 2461,3475
  text "拼版面" at 1640,3750 h60
  text "拼版面" at 2745,1910 h60

## Other copper
Top Layer:
  rectangle: 1880,3320 1938,3405
  rectangle net GND: 1780,565 2240,587
  rectangle net GND: 1240,725 1280,765
  pour cut-out: 950,865 985,865 985,745 950,745
  pour cut-out: 950,2485 985,2485 985,2370 950,2370
  pour cut-out: 1130,2585 1130,2405.66 1146.66,2389 1186,2389 1190,2385 1215,2385 1235,2405 1234.39,2405.61 1234.39,2625.87 1235,2700 1220,2680 1210,2680
Bottom Layer:
  rectangle net GND: 2270,585 2350,620
  rectangle net PWR_ON: 1340,3225 1370,3255
  pour cut-out: 1985.73,994.61 2024.61,994.61 2034.4,1004.4 2034.4,1005.72 2043.23,1005.72 2049.47,999.47 2049.47,800.53 2050,800 2042.28,792.28 2026.88,792.28 1962.76,856.41 1962.76,976.71 1963.97,977.92
  pour cut-out: 2460,865 2425,865 2425,750 2430,745 2461,745

## Silkscreen, mask and mechanical layers (free items; w line width, h text height)
Top Overlay:
  text "PB8" at 1220,2490 h60
  text "PB9" at 1220,2420 h60
  text "POSYSTORAGE" at 1405,2305 h100
  text "PH11" at 1235,2235 h60
  text "PH9" at 1235,2170 h60
  text "V1.1" at 1900,1485 h60
  text "1910" at 1895,1375 h100